# EAGLE board DA_uno_shield_1_0 (EAGLE 7.5.0)
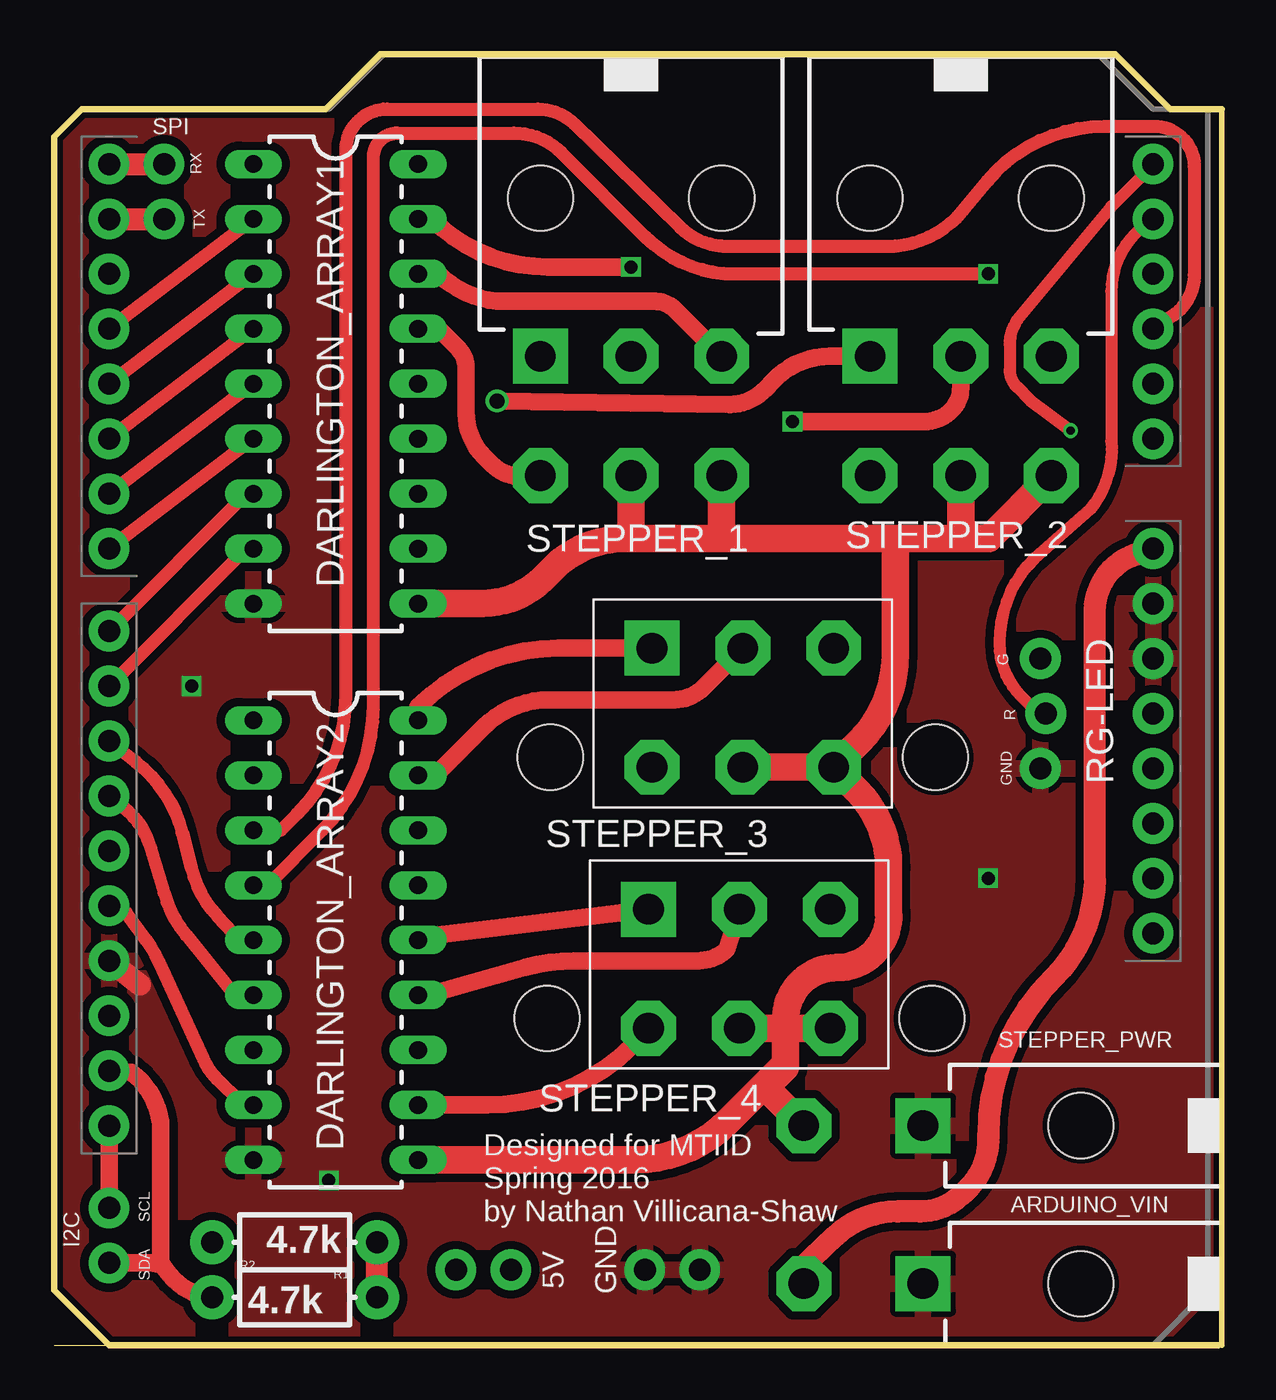
[diagram p0: board, top side]
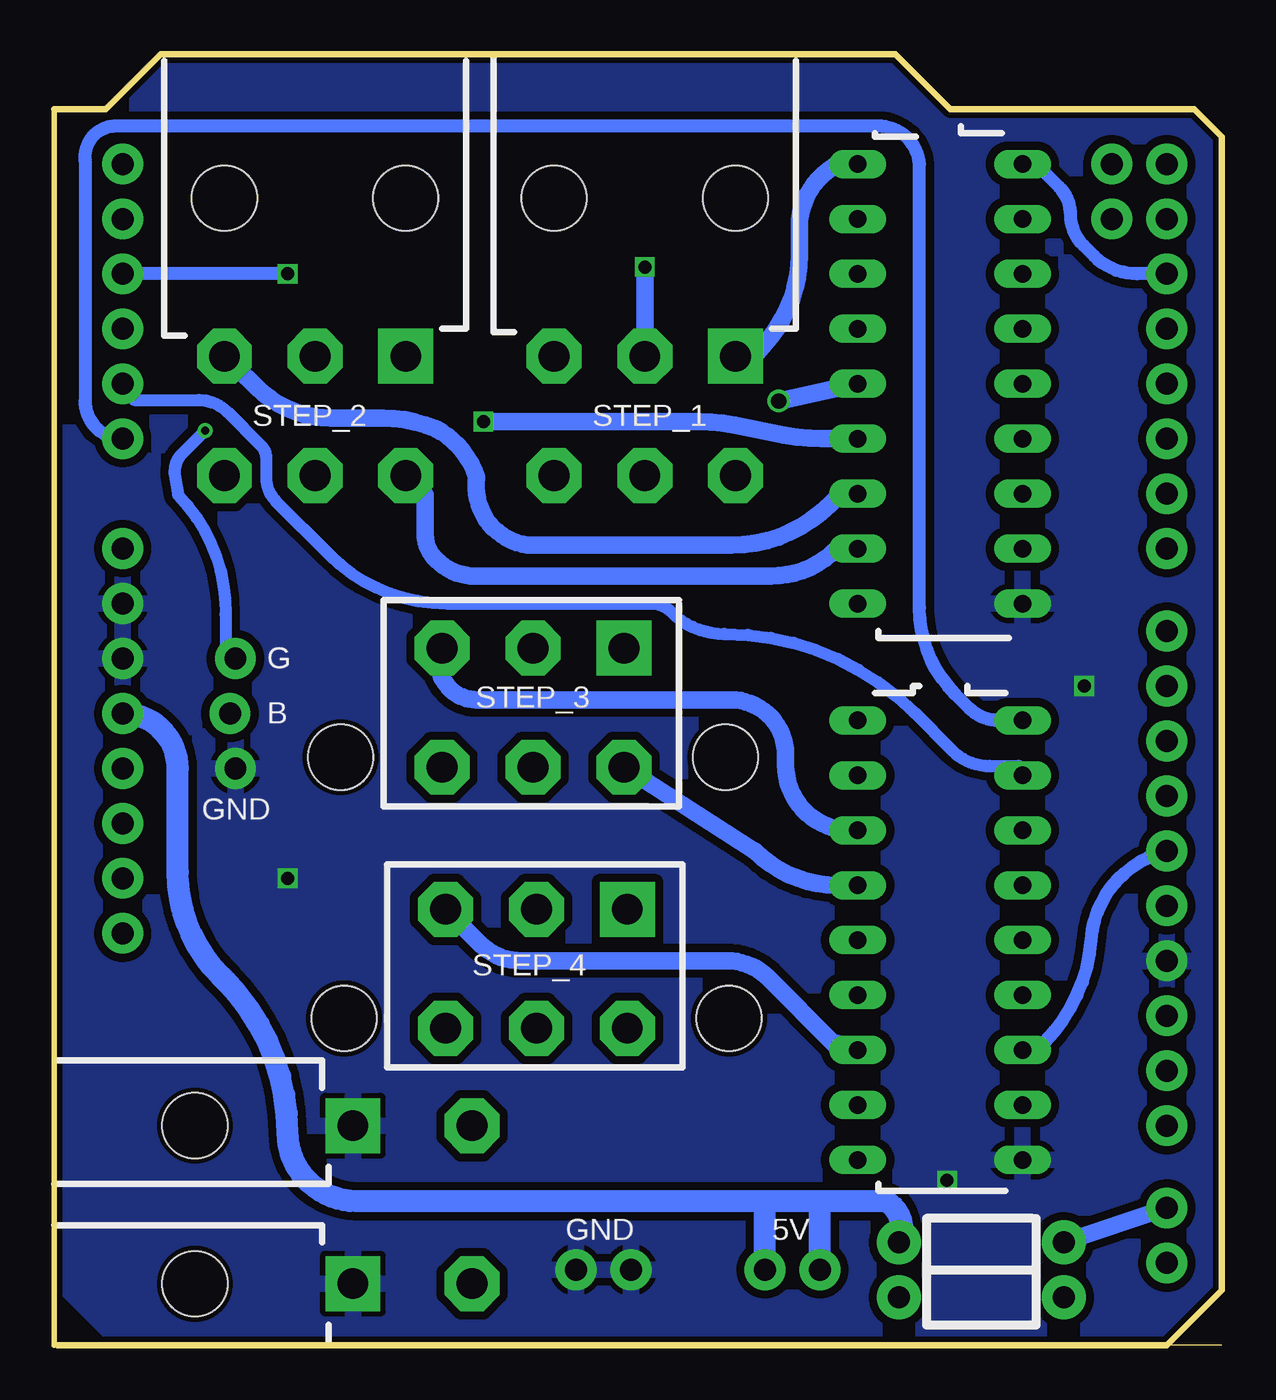
[diagram p1: board, bottom side, seen from below]

Size 53.98 x 59.69 mm. Coordinates in mm from the lower left corner, seen from the top.
Outline: 0,0 2.54,0
Outline: 2.54,0 51.74,0
Outline: 53.98,0 53.98,57.15 51.59,57.15 49.05,59.69 15.08,59.69 12.54,57.15 1.27,57.15 0,55.88 0,2.54 2.54,0
Outline: 2.54,0 53.82,0
Copper layers (1*16): Top 0.035mm / dielectric 1.5mm / Bottom 0.035mm
Design rules "SeeedStudio_2layer_DRU_no_angle_20140221": minimum track width 6mil, minimum drill 12mil, track to track 6mil, track to pad 6mil, pad to pad 6mil, via to via 6mil, smd to smd 0mil, copper to edge 10mil, drill to drill 10mil, minimum pad ring 10mil, minimum via ring 6mil, stop-mask expansion 2mil, vias tented up to drill 100mil, thermal gap 10mil
Net classes: 0 default: width 0.559 mm, drill 0.381 mm, clearance 0.381 mm; 1 GND: width 0.508 mm, drill 0.508 mm, clearance 0.381 mm

## Footprints (pad centres in the part's own frame; a part is rotated, then mirrored left to right if it is on the bottom)
1X02_NO_SILK = drill 1.016 pad 1.88: 1 0,0; 2 2.54,0
UNO_R3_SHIELD = drill 1.016 pad 1.88: 3.3V 50.8,26.67; 5V 50.8,29.21; A0 50.8,41.91; A1 50.8,44.45; A2 50.8,46.99; A3 50.8,49.53; A4 50.8,52.07; A5 50.8,54.61; AREF 2.54,15.24; D2 2.54,49.53; D3 2.54,46.99; D4 2.54,44.45; D5 2.54,41.91; D6 2.54,39.37; D7 2.54,36.83; D8 2.54,33.02; D9 2.54,30.48; D10 2.54,27.94; D11 2.54,25.4; D12 2.54,22.86; D13 2.54,20.32; GND@0 50.8,31.75; GND@1 50.8,34.29; GND@2 2.54,17.78; IOREF 50.8,21.59; NC 50.8,19.05; RES 50.8,24.13; RX 2.54,54.61; SCL 2.54,10.16; SDA 2.54,12.7; TX 2.54,52.07; VIN 50.8,36.83
39-30-?02? = drill 1.422 pad 2.54 square: 1 0,0 | drill 1.422 pad 2.54 octagon: 2 0,5.512 | hole 3: 0,-7.3
DIL18 = drill 0.813 long: 1 -10.16,-3.81; 2 -7.62,-3.81; 3 -5.08,-3.81; 4 -2.54,-3.81; 5 0,-3.81; 6 2.54,-3.81; 7 5.08,-3.81; 8 7.62,-3.81; 9 10.16,-3.81; 10 10.16,3.81; 11 7.62,3.81; 12 5.08,3.81; 13 2.54,3.81; 14 0,3.81; 15 -2.54,3.81; 16 -5.08,3.81; 17 -7.62,3.81; 18 -10.16,3.81
AXIAL-0.3-KIT = drill 1.016 pad 2.032: P$1 -3.81,0; P$2 3.81,0
1X03_LOCK_NO_SILK = drill 1.016 pad 1.88: 1 0,0.127; 2 2.54,-0.127; 3 5.08,0.127
39-30-?06? = drill 1.422 pad 2.54 square: 1 4.191,0 | drill 1.422 pad 2.54 octagon: 2 0,0; 3 -4.191,0; 4 4.191,5.512; 5 0,5.512; 6 -4.191,5.512 | hole 3: -4.191,-7.3; 4.191,-7.3
39-29-?06? = drill 1.422 pad 2.54 square: P$1 8.4,0 | drill 1.422 pad 2.54 octagon: P$2 4.2,0; P$3 0,0; P$4 8.4,5.5; P$5 4.2,5.5; P$6 0,5.5 | hole 3: -4.7,5.04; 13.1,5.04

## Placement (x,y rotation side)
5V  [1X02_NO_SILK]  18.57,3.49 0 top
ARDUINO  ARDUINO_R3_SHIELD  [UNO_R3_SHIELD]  0,0 0 top
ARDUINO_VIN  39-30-02?_S  [39-30-?02?]  40.16,2.86 90 top
DARLINGTON_ARRAY1  [DIL18]  13.02,44.45 270 top
DARLINGTON_ARRAY2  [DIL18]  13.02,18.73 270 top
GND  [1X02_NO_SILK]  27.3,3.49 0 top
I2C  [1X02_NO_SILK]  2.54,3.81 90 top
R1  4.7k  [AXIAL-0.3-KIT]  11.11,4.76 180 top
R2  4.7k  [AXIAL-0.3-KIT]  11.11,2.22 0 top
RG-LED  [1X03_LOCK_NO_SILK]  45.72,26.67 90 top
SPI  [1X02_NO_SILK]  5.08,54.61 270 top
STEPPER_1  39-30-06?_S  [39-30-?06?]  26.67,45.72 180 top
STEPPER_2  39-30-06?_S  [39-30-?06?]  41.91,45.72 180 top
STEPPER_3  39-29-06?  [39-29-?06?]  36.04,32.23 180 top
STEPPER_4  39-29-06?  [39-29-?06?]  35.88,20.16 180 top
STEPPER_PWR  39-30-02?_S  [39-30-?02?]  40.16,10.16 90 top

## Library data of the parts
5V GND I2C RG-LED SPI = SparkFun-Connectors
ARDUINO = Nathans-Arduinos
ARDUINO_VIN STEPPER_1-STEPPER_4 STEPPER_PWR = MTIID-molex-mini-fit-with-some-vertical
DARLINGTON_ARRAY1 DARLINGTON_ARRAY2 = SparkFun-PowerIC
R1 R2 = SparkFun-Resistors

## Nets
5V: 5V.1 5V.2 ARDUINO.5V R1.P$1 R2.P$2
A0: ARDUINO.A0 DARLINGTON_ARRAY2.1
A1: ARDUINO.A1 DARLINGTON_ARRAY2.2
A2: ARDUINO.A2 DARLINGTON_ARRAY2.3
A3: ARDUINO.A3 DARLINGTON_ARRAY2.4
A4: ARDUINO.A4 RG-LED.2
A5: ARDUINO.A5 RG-LED.3
D10: ARDUINO.D10 DARLINGTON_ARRAY2.5
D11: ARDUINO.D11 DARLINGTON_ARRAY2.6
D12: ARDUINO.D12 DARLINGTON_ARRAY2.7
D13: ARDUINO.D13 DARLINGTON_ARRAY2.8
GND: ARDUINO.GND@0 ARDUINO.GND@1 ARDUINO.GND@2 ARDUINO_VIN.1 DARLINGTON_ARRAY1.9 DARLINGTON_ARRAY2.9 GND.1 GND.2 RG-LED.1 STEPPER_PWR.1
N$1: DARLINGTON_ARRAY1.14 STEPPER_2.1
N$2: DARLINGTON_ARRAY1.13 STEPPER_2.2
N$3: DARLINGTON_ARRAY1.12 STEPPER_2.3
N$4: DARLINGTON_ARRAY1.11 STEPPER_2.4
N$5: ARDUINO.D6 DARLINGTON_ARRAY1.5
N$6: ARDUINO.D7 DARLINGTON_ARRAY1.6
N$7: ARDUINO.D8 DARLINGTON_ARRAY1.7
N$8: ARDUINO.D9 DARLINGTON_ARRAY1.8
N$30: DARLINGTON_ARRAY2.18 STEPPER_3.P$1
N$33: ARDUINO.D2 DARLINGTON_ARRAY1.1
N$34: DARLINGTON_ARRAY1.18 STEPPER_1.1
N$35: DARLINGTON_ARRAY1.17 STEPPER_1.2
N$36: DARLINGTON_ARRAY1.16 STEPPER_1.3
N$37: DARLINGTON_ARRAY1.15 STEPPER_1.4
N$38: ARDUINO.D3 DARLINGTON_ARRAY1.2
N$39: ARDUINO.D4 DARLINGTON_ARRAY1.3
N$40: ARDUINO.D5 DARLINGTON_ARRAY1.4
N$41: DARLINGTON_ARRAY2.17 STEPPER_3.P$2
N$42: DARLINGTON_ARRAY2.16 STEPPER_3.P$3
N$43: DARLINGTON_ARRAY2.15 STEPPER_3.P$4
N$44: DARLINGTON_ARRAY2.14 STEPPER_4.P$1
N$45: DARLINGTON_ARRAY2.13 STEPPER_4.P$2
N$46: DARLINGTON_ARRAY2.12 STEPPER_4.P$3
N$47: DARLINGTON_ARRAY2.11 STEPPER_4.P$4
RX: ARDUINO.RX SPI.1
SCL: ARDUINO.SCL I2C.2 R1.P$2
SDA: ARDUINO.SDA I2C.1 R2.P$1
TX: ARDUINO.TX SPI.2
VCC: DARLINGTON_ARRAY1.10 DARLINGTON_ARRAY2.10 STEPPER_1.5 STEPPER_1.6 STEPPER_2.5 STEPPER_2.6 STEPPER_3.P$5 STEPPER_3.P$6 STEPPER_4.P$5 STEPPER_4.P$6 STEPPER_PWR.2
VIN: ARDUINO.VIN ARDUINO_VIN.2

## Tracks (layer width: path | path; a pad name or v marks a point on that pad's centre or on a via)
5V
  Top 1.016: R2.P$2 R1.P$1
  Bottom 1.016: R1.P$1 arc-90 15.56,6.67 18.57,6.67 | 18.57,6.67 21.11,6.67 | 21.11,6.67 40.01,6.67 arc90 43.18,9.84 arc-45 46.1,16.89 46.26,17.05 arc45 48.26,21.88 48.26,26.67 arc-90 ARDUINO.5V | 5V.1 18.57,6.67 | 5V.2 21.11,6.67
A0
  Bottom 0.61: DARLINGTON_ARRAY2.1 10.35,28.89 arc45 11.65,29.43 12.31,30.09 arc45 13.97,34.1 13.97,54.61 arc-90 16.03,56.36 51.26,56.36 arc-90 52.55,54.76 52.55,43.66 arc-90 ARDUINO.A0
A1
  Bottom 0.559: DARLINGTON_ARRAY2.2 9.4,26.78 10.73,26.78 arc45 12.46,27.5 14.22,29.25 arc-45 23,32.89 arc45 25.45,33.9 arc-45 26.41,34.3 35.83,34.3 arc45 41.24,36.55 43.72,39.02 arc45 44.17,40.11 44.17,41.03 arc-45 44.39,41.58 45.98,43.16 arc-45 47.29,43.7 50.28,43.7 50.75,44.17 ARDUINO.A1
A2
  Top 0.61: DARLINGTON_ARRAY2.3 10.48,23.81 11.23,24.57 arc45 13.49,30.02 13.49,55.24 arc-90 15.4,57.15 22.35,57.15 arc-44 24.04,56.46 28.92,51.7 arc44 31.14,50.8 38.49,50.8 arc50 42.01,52.46 43.14,53.82 arc-50 48.54,56.36 50.85,56.36 arc-90 52.7,54.5 52.7,49.48 arc-56 51.69,47.58 ARDUINO.A2
A3  (via drill 0.6)
  Top 0.61: DARLINGTON_ARRAY2.4 9.84,21.27 12.4,23.83 arc45 14.76,29.54 14.76,54.93 arc-90 15.88,56.04 21.25,56.04 arc-45 23.46,55.12 27.35,51.23 arc45 31.46,49.53 v43.18,49.53
  Bottom 0.61: v43.18,49.53 ARDUINO.A3
A4
  Top 0.559: RG-LED.2 45.58,29.6 45.11,29.6 44.69,30.03 arc-45 43.7,32.41 43.7,32.51 arc-45 45.3,36.38 47.88,38.63 arc45 48.87,41.8 48.87,48.71 arc-45 49.98,51.39 50.75,52.16 ARDUINO.A4
A5  (via drill 0.38)
  Top 0.559: v46.99,42.29 45.1,43.7 45.11,43.7 44.5,44.31 arc-45 44.17,45.1 44.17,46.27 arc-40 44.63,47.55 48.87,52.64 48.87,52.63 50.75,54.51 ARDUINO.A5
  Bottom 0.559: v46.99,42.29 48.07,41.21 arc-54 48.39,40.23 48.24,39.31 arc45 46.05,33.8 46.05,31.95 RG-LED.3
D10
  Top 0.61: ARDUINO.D10 3.75,27 arc-38 5.92,23.7 6.34,22.06 arc28 7.55,19.84 8.57,18.73 DARLINGTON_ARRAY2.5
D11
  Top 0.61: ARDUINO.D11 3.19,24.88 arc-35 4.47,22.98 5.08,20.92 arc22 6.1,18.97 8.1,16.51 DARLINGTON_ARRAY2.6
D12
  Bottom 0.61: DARLINGTON_ARRAY2.7 9.05,13.81 8.41,13.81 8.19,14.04 arc-41 6.03,18.73 arc72 ARDUINO.D12 2.64,22.86
D13
  Top 0.61: ARDUINO.D13 3.33,20 4.23,18.77 arc-11 4.87,17.68 6.9,13.24 arc20 7.56,12.28 8.57,11.27 DARLINGTON_ARRAY2.8
GND  (via drill 0.6)
  Top 1.016: ARDUINO.GND@2 3.97,16.67
  other vias: 6.35,30.48 43.18,21.59 12.7,7.62
  pour Bottom: 15.24,59.69 12.7,57.15 1.27,57.15 0,55.88 0,2.54 2.54,0 50.8,0 53.34,2.54 53.34,57.15 50.8,57.15 48.26,59.69
  pour Top: 1.27,57.15 0,55.88 0,2.54 2.54,0 50.8,0 53.34,2.54 53.34,57.15 50.8,57.15 48.26,59.69 15.24,59.69 12.7,57.15
N$1  (via drill 0.7)
  Top 0.813: v20.48,43.66 31.23,43.5 arc47 32.9,44.22 33.22,44.57 arc-47 35.86,45.72 STEPPER_2.1
  Bottom 0.813: DARLINGTON_ARRAY1.14 v20.48,43.66
N$2  (via drill 0.6)
  Top 0.813: v34.13,42.7 40.22,42.7 arc45 41.48,43.22 arc45 41.91,44.27 STEPPER_2.2
  Bottom 0.813: v34.13,42.7 24.16,42.7 arc11 22.53,42.54 20.24,42.08 arc-11 18.48,41.91 DARLINGTON_ARRAY1.13
N$3
  Bottom 0.813: DARLINGTON_ARRAY1.12 17.62,39.37 18.12,38.87 arc45 22.66,36.99 32.09,36.99 arc90 34.45,40.14 arc-45 36.34,42.38 arc-23 38.78,42.86 41.17,42.86 arc45 44.6,44.28 44.93,44.61 45.72,45.34 STEPPER_2.3
N$4
  Bottom 0.813: DARLINGTON_ARRAY1.11 17.78,36.83 arc45 20.85,35.56 34.51,35.56 arc45 36.3,36.3 arc45 36.83,37.57 36.83,39.32 STEPPER_2.4
N$5
  Top 0.61: ARDUINO.D6 DARLINGTON_ARRAY1.5
N$6
  Top 0.61: ARDUINO.D7 DARLINGTON_ARRAY1.6
N$7
  Top 0.61: ARDUINO.D8 8.89,39.37 DARLINGTON_ARRAY1.7
N$8
  Top 0.61: ARDUINO.D9 8.89,36.83 DARLINGTON_ARRAY1.8
N$30
  Top 0.813: DARLINGTON_ARRAY2.18 16.83,29.53 arc-45 23.34,32.23 STEPPER_3.P$1
N$33
  Bottom 0.61: ARDUINO.D2 3.9,49.53 arc45 5.91,50.36 6.4,50.85 arc45 6.99,52.27 arc-45 7.52,53.56 8.57,54.61 DARLINGTON_ARRAY1.1
N$34
  Bottom 0.813: DARLINGTON_ARRAY1.18 17.78,54.61 18.18,54.32 arc-54 19.53,51.67 19.53,50.39 arc39 20.87,46.6 21.59,45.72 STEPPER_1.1
N$35  (via drill 0.6)
  Top 0.813: DARLINGTON_ARRAY1.17 17.46,52.07 arc45 22.83,49.85 v26.67,49.85
  Bottom 0.813: v26.67,49.85 STEPPER_1.2
N$36
  Top 0.813: DARLINGTON_ARRAY1.16 17.78,49.53 arc45 20.85,48.26 27.77,48.26 arc-45 28.71,47.87 STEPPER_1.3
N$37
  Top 0.813: DARLINGTON_ARRAY1.15 17.78,46.99 18.68,46.09 arc-45 19.05,45.19 19.05,43.09 arc45 19.88,41.08 20.23,40.73 arc45 21.59,40.16 22.43,40.16 STEPPER_1.4
N$38
  Top 0.61: ARDUINO.D3 DARLINGTON_ARRAY1.2
N$39
  Top 0.61: ARDUINO.D4 DARLINGTON_ARRAY1.3
N$40
  Top 0.61: ARDUINO.D5 DARLINGTON_ARRAY1.4
N$41
  Top 0.813: DARLINGTON_ARRAY2.17 17.62,26.35 19.83,28.56 arc-45 22.93,29.84 28.66,29.84 arc45 30.02,30.41 STEPPER_3.P$2
N$42
  Bottom 0.813: DARLINGTON_ARRAY2.16 17.14,23.81 arc90 20.16,26.83 20.16,27.3 arc-90 22.7,29.84 34.45,29.84 arc90 36.2,31.59 36.2,32.07 arc90 STEPPER_3.P$3
N$43
  Bottom 0.813: DARLINGTON_ARRAY2.15 17.76,21.27 arc45 21.59,22.86 STEPPER_3.P$4
N$44
  Top 0.559: DARLINGTON_ARRAY2.14 16.92,18.8 16.99,18.89
  Top 0.813: 16.99,18.89 STEPPER_4.P$1
N$45
  Top 0.813: DARLINGTON_ARRAY2.13 16.99,16.35 17.78,16.35 21.77,17.47 arc-16 24.06,17.78 29.8,17.78 arc45 31.11,18.32 STEPPER_4.P$2
N$46
  Bottom 0.813: STEPPER_4.P$3 34.28,18.56 arc-45 32.39,17.78 22.87,17.78 arc45 20.96,16.99 17.94,13.97 17.78,13.97 DARLINGTON_ARRAY2.12
N$47
  Top 0.813: DARLINGTON_ARRAY2.11 20.01,11.11 arc49 27.29,14.44 STEPPER_4.P$4
RX
  Top 1.016: ARDUINO.RX SPI.1
SCL
  Top 0.813: ARDUINO.SCL I2C.2
  Bottom 0.813: I2C.2 R1.P$2
SDA
  Top 0.813: ARDUINO.SDA 3.57,12.63 arc-45 4.92,10.32 4.92,3.81 4.45,3.81 | 4.45,3.81 5,3.73 arc45 7.02,2.22 R2.P$1 | I2C.1 4.45,3.81
TX
  Top 1.016: ARDUINO.TX SPI.2
VCC
  Top 0.559: 32.72,11.92 32.89,11.75 32.98,11.83
  Top 0.813: DARLINGTON_ARRAY1.10 17.78,34.29
  Top 1.27: 17.78,34.29 19.79,34.29 arc45 22.59,35.45 23.03,35.89 arc-45 26.45,37.31 26.99,37.31 | 26.99,37.31 30.96,37.31 | 38.89,37.31 42.23,37.31 | 42.23,37.31 43.2,37.31 STEPPER_2.6 | STEPPER_1.5 26.67,37.62 26.99,37.31 | STEPPER_1.6 30.86,37.4 30.96,37.31 | STEPPER_2.5 41.91,37.62 42.23,37.31 | STEPPER_3.P$6 37.11,25.65 arc-45 38.58,22.11 38.58,20.02 arc-94 36.2,17.46 arc90 33.81,15.08 | STEPPER_3.P$6 STEPPER_3.P$5 | 30.96,37.31 38.89,37.31 | 38.89,37.31 38.89,31.97 arc-45 37.2,27.89 STEPPER_3.P$6 | DARLINGTON_ARRAY2.10 26.87,8.57 arc45 31.14,10.34 32.72,11.92 33.81,13.02 | STEPPER_PWR.2 32.98,11.83 32.91,11.91 32.86,11.91 33.81,12.86 33.81,15.08 | STEPPER_4.P$5 STEPPER_4.P$6 34.23,14.66 33.81,15.08
  Top 1.422: STEPPER_1.6 31.07,40.21
VIN
  Top 1.016: ARDUINO.VIN 49.93,36.54 arc27 48.95,35.94 48.92,35.91 arc45 48.1,33.92 48.1,21.61 arc-45 46.18,16.97 arc45 43.18,9.73 43.18,9.53 arc-47 42.13,7.12 41.9,6.92 arc-43 40.05,6.19 38.98,6.19 arc44 36.09,5.03 33.97,3.02 ARDUINO_VIN.2

## Text on the board
tNames: RX | TX | G | R | GND | SCL | Designed for MTIID / Spring 2016 / by Nathan Villicana-Shaw | SDA
bNames: STEP_1 | STEP_2 | G | STEP_3 | B | GND | STEP_4 | 5V | GND